# Altium PCB v007 pcb.PCBDOC
Units mm, origin at the board's own origin, x right, y up, seen from the top; angles counter-clockwise.
Board outline 15.54 x 5.89 mm, 2 copper layers (Top Layer, Bottom Layer); 13 components, 30 nets, 89 pads, 26 vias.
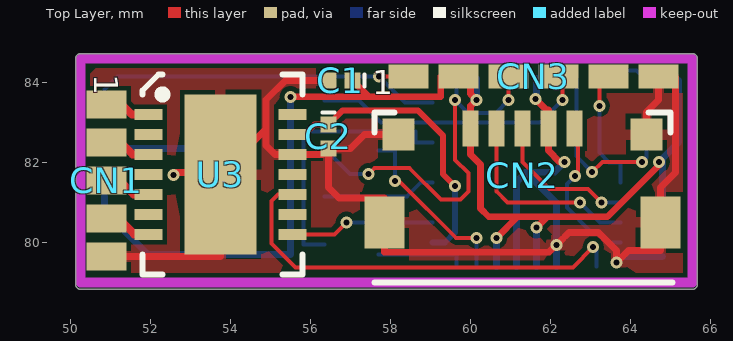
[diagram p0: Top Layer view]
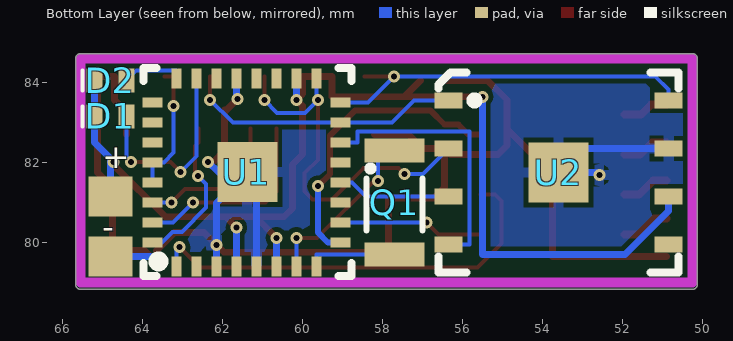
[diagram p1: Bottom Layer view, seen from below]

## Layer stack, top to bottom
Top Layer: signal copper 0.0356
Dielectric: core 0.32, FR-4, Dk 4.8
Bottom Layer: signal copper 0.0356

## Board outline
50.25,78.83 cw(c50.25,78.95) 50.13,78.95 50.13,84.6 cw(c50.25,84.6) 50.25,84.72 65.55,84.72 cw(c65.55,84.6) 65.67,84.6 65.67,78.95 cw(c65.55,78.95) 65.55,78.83

## Design rules (kind name [scope] priority, off if disabled: settings)
Clearance Clearance_Pad [All vs IsPad] p1: gap=0.12
Clearance Clearance_Via [(IsVia) vs (IsVia)] p2: gap=0.12
Clearance Polygon [InPoly vs IsPad] p3: gap=0.15
Clearance [All] p4: gap=0.12
FabricationTestPointUsage TestPointUsage [All] p1: valid=0 allowmultiple=FALSE
FabricationTestpoint Testpoint [All] p1: side=3 testpointundercomponent=TRUE minsize=1.016 maxsize=2.54 preferedsize=1.524 minholesize=0 maxholesize=1.016 preferedholesize=0.813 testpointgrid=0.025 allowsidetop=TRUE allowsidebottom=TRUE usegrid=TRUE gridtolerance=0
HoleSize [All] p1: absolutevalues=TRUE maxlimit=2.54 minlimit=0.04 maxpercent=80.000 minpercent=20.000
PolygonConnect [All] p1: connectstyle=Relief reliefconductorwidth=0.254 reliefentries=4 polygonreliefangle="90 Angle"
RoomDefinition "v007 schematics" [InComponentClass('v007 schematics')] p1: confinementstyle=ConfineIn formatcopy=TRUE lockcomponents=FALSE outline 0,0 50.8,0 50.8,25.4 0,25.4
RoutingCorners [All] p1: cornerstyle=Round minsetback=1 maxsetback=1
RoutingVias [All] p1: holewidth=0.15 width=0.3 viastyle="Through Hole" minholewidth=0.15 minwidth=0.3 maxholewidth=0.15 maxwidth=0.3
SMDNeckDown [All] p1: percent=100.000
SilkscreenOverComponentPads [All] p1: minsilkscreentomaskgap=0.254
SolderMaskExpansion SolderMaskExpansion_1 [(IsVia)] p1: expansion=-0.15
SolderMaskExpansion [All] p2: expansion=0.05
Width Width_3 [(InNet('PD5') OR InNet('PC5') OR InNet('NetD1_1'))] p1: maxlimit=0.15 minlimit=0.15 preferedwidth=0.15
Width Width_2 [(InNet('HEAD 1') OR InNet('HEAD 2') OR InNet('HEAD 3') OR InNet('HCOMMON'))] p2: maxlimit=0.2 minlimit=0.2 preferedwidth=0.2
Width Width_1 [(InNet('GND') OR InNet('VCC'))] p3: maxlimit=0.17 minlimit=0.17 preferedwidth=0.17
Width [All] p4: maxlimit=0.1 minlimit=0.1 preferedwidth=0.1
23 further rules are at their usual default settings.

## Components (designator, comment, footprint, x,y, rotation, side; value= is the part's Value field where it differs from the comment)
+ "No component mounted" SU01LS#1 64.7,81.15 r270 bottom
- "No component mounted" SU01LS#2 64.75,79.6 r90 bottom
C1 "100nF" CC0603(0201) 57.05,83.9 r180 top
C2 "100nF" CC0603(0201) 56.6,82.95 r270 top
CN1 "No component mounted" SU05LSR 50.9,83.45 r270 top
CN2 "Micro USB AB" "MICRO USB RECEPTACLE SMALL" 57.3,83.85 r0 top
CN3 "No component mounted" "SU06LST THICKER" 57.85,84.55 r0 top
D1 "LED1" CC1005(0402) 65.3,83.4 r180 bottom
D2 "LED1" CC1005(0402) 65.3,84.3 r180 bottom
Q1 "32.768khz crystal 1.5 x 3.2mm" "Quartz SMD 2" 56.8,82.7 r270 bottom
U1 "ATMEL ATMEGA168V-10MU-ND" "32M1-A L 3" 64,79.15 r90 bottom
U2 "ATMEL 4MBit DataFlash" "8M1-A MLF 3" 56.6,84.25 r180 bottom
U3 "Asic 3V MLF14" "delta asic - 5" 55.8,84.2 r270 top

## Footprints (in the part's own frame and the unit in brackets; to place one, negate y for a bottom-side part, rotate by r counter-clockwise, add the part's x,y. Pads: shape width x height; smd on the part's side, far side on the other; paste and mask are expansions set on the pad)
"8M1-A MLF 3" [mm] "for at45db161d"
  rect 0.7x0.4 smd: 1(0.25,-0.7) 2(0.25,-1.9) 3(0.25,-3.1) 4(0.25,-4.3) 5(5.75,-4.3) 6(5.75,-3.1) 7(5.75,-1.9) 8(5.75,-0.7)
  rect 1.5x1.5 smd: 9(3,-2.5)
  silkscreen extent 0,-5 6,0, body extent 0,-5 6,0, height 1
"32M1-A L 3" [mm] "atmel uc modified"
  rect 0.5x0.25 smd: 1(0.25,-0.85) 2(0.25,-1.35) 3(0.25,-1.85) 4(0.25,-2.35) 5(0.25,-2.85) 6(0.25,-3.35) 7(0.25,-3.85) 8(0.25,-4.35) 17(4.95,-4.35) 18(4.95,-3.85) 19(4.95,-3.35) 20(4.95,-2.85) 21(4.95,-2.35) 22(4.95,-1.85) 23(4.95,-1.35) 24(4.95,-0.85)
  rect 0.25x0.5 smd: 9(0.85,-4.95) 10(1.35,-4.95) 11(1.85,-4.95) 12(2.35,-4.95) 13(2.85,-4.95) 14(3.35,-4.95) 15(3.85,-4.95) 16(4.35,-4.95) 25(4.35,-0.25) 26(3.85,-0.25) 27(3.35,-0.25) 28(2.85,-0.25) 29(2.35,-0.25) 30(1.85,-0.25) 31(1.35,-0.25) 32(0.85,-0.25)
  rect 1.5x1.5 smd: 33(2.607,-2.624)
  silkscreen extent 0.01,-5.22 5.21,-0.02, body extent 0.1,-5.1 5.1,-0.1, height 1
CC0603(0201) [mm]
  rect 0.4x0.4 smd: 1(0,-0.15) 2(0.6,-0.15)
  silkscreen extent -0.3,-0.3 -0.3,0, body extent 0,-0.3 0.6,0, height 1
CC1005(0402) [mm]
  rect 0.4x0.6 smd: 1(0.1,-0.25) 2(0.9,-0.25)
  silkscreen extent -0.2,-0.5 -0.2,0, body extent 0,-0.5 1,0, height 1
"delta asic - 5" [mm]
  rect 0.28x0.7 smd: 1(1,-3.85) 2(1.5,-3.85) 3(2,-3.85) 4(2.5,-3.85) 5(3,-3.85) 6(3.5,-3.85) 7(4,-3.85) 8(4,-0.25) 9(3.5,-0.25) 10(3,-0.25) 11(2.5,-0.25) 12(2,-0.25) 13(1.5,-0.25) 14(1,-0.25)
  rect 4x1.8 smd: 15(2.5,-2.05)
  silkscreen extent 0,-4 5,0, body extent 0,-4 5,0, height 0.7
"MICRO USB RECEPTACLE SMALL" [mm] "Micro USB Receptacle (1981568-1-c - type b)"
  rect 0.4x0.9 smd: 1(2.7,-1) 2(3.35,-1) 3(4,-1) 4(4.65,-1) 5(5.3,-1)
  rect 1x1.3 smd: 6(0.55,-3.35) 6(7.45,-3.35)
  rect 0.8x0.8 smd: 6(0.9,-1.15) 6(7.1,-1.15)
  silkscreen extent 0.3,-4.85 7.75,-0.6, body extent 0.25,-5.55 7.75,-0.55, height 3
"Quartz SMD 2" [mm] "CC7V-T1A"
  rect 0.6x1.5 smd: 1(0.4,-0.9) 2(3,-0.9)
  silkscreen extent 0.8,-1.6 2.4,-0.2, body extent 0.1,-1.65 3.3,-0.15, height 0.5
SU01LS#1 [mm]
  rect 1x1.1 smd: 1(0,-0.1)
SU01LS#2 [mm]
  rect 1x1.1 smd: 1(0.05,0.05)
SU05LSR [mm]
  rect 0.7x1 smd: 1(0,0) 2(0.95,0) 3(1.9,0) 4(2.85,0) 5(3.8,0)
"SU06LST THICKER" [mm]
  rect 1x0.6 smd: 1(0.6,-0.4) 2(1.85,-0.4) 3(3.1,-0.4) 4(4.35,-0.4) 5(5.6,-0.4) 6(6.85,-0.4)

## Part data
+ -: library part "1pin smd"
C1 C2: library part Cap, "100nf Capacitor - Footprint CC0603 (0201)"
CN1: library part "5pin smd"
CN2: library part "micro usb", "Connector Receptacle Micro USB AB SMD Reverse Angle"
CN3: library part "6pin smd"
D1: library part LED3, "LED 0402 BLUE 465NM TRANSPARENT"
D2: library part LED3, "LED 0402 RED 465NM TRANSPARENT"
Q1: library part "2pin smd", "CRYSTAL 32.768KHZ 1.5 x 3.2mm"
U1: library part ATmega8L-8MC, "IC AVR MCU 16K 10MHZ 32-QFN 8-Bit AVR Microcontroller"
U2: library part at45db041b, "ATMEL 16MBit DataFlash"
U3: library part "delta asic 3volt"

## Via types
v1: diameter 0.3, hole 0.15, Top Layer to Bottom Layer, 26 vias

## Nets (pads, with @x,y where several pads share a name; then routed paths per layer and width w, separated by ;. In a path a pad name is that pad's centre, name@x,y a point inside that pad or via, vN(x,y) a via of type N, cw(c..) or ccw(c..) an arc to the next point about the centre after c; other vN are vias at no path point)
ADC6: U1.19
ADC7: U1.22
GND: -.1 C1.2 C2.2 CN1.5 CN2.4 CN2.6 CN3.6 U1.3 U1.5 U1.21 U1.33 U2.7 U2.9 U3.12 U3.15 | length 47.4
  Top Layer w0.17: CN1.5 53.75,79.65 U3.15 ; v1(52.578,81.686) 52.642,81.75 53.7,81.75 U3.15 ; C1.2 55.372,84.05 54.889,83.567 ; CN2.6@58.2,82.7 57.348,82.7 56.998,82.35 C2.2 ; v1(61.62,83.591) 61.9,83.312 61.95,83.312 CN2.4 61.95,82.296 62.229,82.017 v1(62.357,82.017) ; CN2.6@64.4,82.7 64.4,83.261 64.7,83.561 CN3.6 65.126,84.15 65.126,81.747 64.75,81.372 64.75,80.5 64.75,79.801 63.951,79.801 v1(63.652,79.502) 63.652,79.801 63.203,80.25 62.462,80.25 ; U3.15 54.889,82.839 ; 54.889,82.839 54.889,83.567 ; 54.889,82.839 54.889,83.567 ; 54.889,82.839 54.889,82.423 55.112,82.2 U3.12 56.3,82.2 C2.2 ; C2.2 56.45,81.37 56.711,81.109 57.85,81.109 57.85,80.5 57.85,79.756 61.968,79.756 v1(62.15,79.938) ; v1(62.15,79.938) 62.462,80.25 ; v1(62.15,79.938) 62.462,80.25
  Bottom Layer w0.17: U2.7 53,82.35 U2.9 52.642,81.75 v1(52.578,81.686) ; U1.5 61.15,81.5 U1.33 ; v1(61.62,83.591) 61.65,83.621 U1.21 ; U1.3 v1(62.15,79.938) 62.15,80.983 U1.33 ; v1(62.357,82.017) 62.097,81.757 U1.33 ; v1(63.652,79.502) 63.8,79.65 -.1
HCOMMON: CN1.1 U3.1 | length 1.2
  Top Layer w0.2: CN1.1 51.283,83.45 51.533,83.2 U3.1
"HEAD 1": CN1.2 U3.3 | length 1.2
  Top Layer w0.2: CN1.2 51.257,82.5 51.557,82.2 U3.3
"HEAD 2": CN1.3 U3.5 | length 1.2
  Top Layer w0.2: CN1.3 51.232,81.55 51.582,81.2 U3.5
"HEAD 3": CN1.4 U3.7 | length 1.2
  Top Layer w0.2: CN1.4 51.206,80.6 51.593,80.214 51.593,80.2 U3.7
PB0: U1.12 U2.3 | length 2.8
  Bottom Layer w0.1: U2.3 58.407,81.15 58.757,81.5 U1.12
PB1: U1.13
PB2: U1.14 U2.4 | length 6.8
  Bottom Layer w0.1: U2.4 55.829,79.95 55.829,82.779 58.623,82.779 58.623,82.5 U1.14
PB3: CN3.4 U1.15 U2.1 | length 7.1
  Top Layer w0.1: CN3.4 62.306,84.15 v1(62.306,83.566)
  Bottom Layer w0.1: U2.1 57.216,83.55 57.766,83 U1.15 61.74,83 v1(62.306,83.566)
PB4: CN3.1 U1.16 U2.8 | length 9.6
  Top Layer w0.1: v1(57.709,84.15) CN3.1
  Bottom Layer w0.1: U2.8 50.85,83.82 51.18,84.15 v1(57.709,84.15) 58.359,83.5 U1.16
PB5: CN3.3 U1.17 U2.2 | length 9.9
  Top Layer w0.1: v1(57.455,81.712) 57.598,81.855 58.48,81.855 59.259,81.076 59.753,81.076 59.95,81.274 59.95,81.731 59.614,82.067 v1(59.614,83.566) ; v1(60.95,83.556) CN3.3
  Bottom Layer w0.1: U2.2 56.988,81.712 v1(57.455,81.712) ; v1(59.614,83.566) v1@59.65,83.53 ; U1.17 59.65,83.566 v1@59.65,83.53 ; v1(60.95,83.556) 60.633,83.239 59.941,83.239 ; v1@59.65,83.53 59.941,83.239 ; v1@59.65,83.53 59.941,83.239
PC0: D1.2 U1.23 | length 5
  Top Layer w0.1: v1(63.043,81.763) 63.297,82.017 v1(64.287,82.017)
  Bottom Layer w0.1: U1.23 62.65,82.155 v1(63.043,81.763) ; v1(64.287,82.017) 64.4,82.129 D1.2
PC1: D2.2 U1.24 | length 1.5
  Bottom Layer w0.1: U1.24 63.15,84.295 64.155,84.295 D2.2
PC2: U1.25
PC3: U1.26
PC4: U1.27
PD2: CN2.5 U1.32 | length 3.8
  Top Layer w0.1: CN2.5 62.6,82.499 62.683,82.416 62.683,81.733 v1(62.611,81.661)
  Bottom Layer w0.1: v1(62.611,81.661) 62.408,81.458 62.408,80.874 63.017,80.264 63.246,80.264 63.51,80 U1.32
PD3: U1.1 U3.10 | length 10.7
  Top Layer w0.1: U3.10 55.19,81.2 55.029,81.038 55.029,79.972 55.625,79.375 62.56,79.375 v1(63.068,79.883)
  Bottom Layer w0.1: v1(63.068,79.883) 63.15,79.801 U1.1
PD4: U1.2
PD5: C2.1 U1.9 U3.13 | length 7.5
  Top Layer w0.15: U3.13 55.855,82.7 56.105,82.95 C2.1 56.795,83.295 58.691,83.295 59.309,82.677 59.309,81.712 v1(59.614,81.407)
  Bottom Layer w0.15: U1.9 59.363,80 59.614,80.251 v1(59.614,81.407)
PD6: U1.10 U3.8 | length 3.6
  Top Layer w0.1: U3.8 56.596,80.2 v1(56.896,80.5)
  Bottom Layer w0.1: v1(56.896,80.5) U1.10
PD7: U1.11
RST: CN3.5 U1.28 U1.29 | length 3.3
  Top Layer w0.1: v1(63.221,83.414) 63.221,84.15 CN3.5
  Bottom Layer w0.1: v1(63.221,83.414) 63.221,82.245 63.466,82 U1.28 U1.29
RX: CN2.3 U1.30 | length 3.7
  Top Layer w0.1: CN2.3 61.3,82.007 61.976,81.331 62.941,81.331 v1(63.271,81.001)
  Bottom Layer w0.1: v1(63.271,81.001) U1.30
TOSC1: Q1.1 U1.7 | length 4.5
  Top Layer w0.1: v1(58.115,81.534) 58.217,81.534 59.633,80.118 v1(60.15,80.118)
  Bottom Layer w0.1: Q1.1 58.115,82.3 v1(58.115,81.534) ; U1.7 v1(60.15,80.118)
TOSC2: Q1.2 U1.8 | length 2.2
  Bottom Layer w0.1: Q1.2 59.65,79.7 U1.8
TX: CN2.2 U1.31 | length 5
  Top Layer w0.1: CN2.2 60.65,81.28 60.929,81.001 v1(62.738,81.001)
  Bottom Layer w0.1: v1(62.738,81.001) 63.239,80.5 U1.31
VCC: +.1 C1.1 CN2.1 CN3.2 D1.1 D2.1 U1.4 U1.6 U1.18 U2.6 | length 36.3
  Top Layer w0.17: v1(55.499,83.642) 57.458,83.642 ; C1.1 57.458,83.642 ; v1(60.65,80.116) 61.177,80.642 ; v1(61.65,80.37) 61.923,80.642 ; v1(64.719,82.017) 64.719,81.94 63.421,80.642 ; 57.458,83.642 59.258,83.642 ; 57.458,83.642 59.258,83.642 ; 59.258,83.642 59.258,84.15 CN3.2 60,84.15 60,83.716 v1(60.15,83.566) 60,83.416 CN2.1 60,82.2 60.25,81.95 60.25,80.85 60.458,80.642 61.177,80.642 ; 61.177,80.642 61.923,80.642 ; 61.177,80.642 61.923,80.642 ; 61.923,80.642 63.421,80.642 ; 61.923,80.642 63.421,80.642 ; 61.923,80.642 63.421,80.642
  Bottom Layer w0.17: U2.6 50.85,80.79 51.94,79.7 55.499,79.7 v1(55.499,83.642) ; v1(60.15,83.566) U1.18 ; U1.6 v1(60.65,80.116) ; U1.4 v1(61.65,80.37) ; v1(64.719,82.017) v1@64.8,82.097 ; +.1 64.8,82.017 v1@64.8,82.097 ; D2.1 D1.1 65.2,82.497 ; v1@64.8,82.097 65.2,82.497 ; v1@64.8,82.097 65.2,82.497
pads on no net: U1.20 U2.5 U3.2 U3.4 U3.6 U3.9 U3.11 U3.14

## Polygon pours and split planes (outlines as drawn)
GND on Top Layer "Bottom Layer-No Net" (solid, remove dead copper, pour order 1000): 50.3,84.55 65.6,84.55 65.6,79.1 50.3,79.1
GND on Bottom Layer "Bottom Layer-No Net" (solid, remove dead copper, pour order 1001): 65.6,84.5 65.547,84.449 65.547,79.1 50.353,79.1 50.3,79.151 50.3,84.5

## Keep-outs
Keep-Out Layer:
  lines w0.24: 50.25,79 50.25,84.6 65.55,84.6 65.55,79 50.25,79

## Dimensions
50.25,79 to 65.55,79 on Mechanical 1
50.25,79 to 50.25,84.6 on Mechanical 1

## Text inside footprints (layer, text, board x,y; h text height)
CN1: Top Overlay "1" at 50.6,84.2 h0.6 r270
CN3: Top Overlay "1" at 57.55,83.7 h0.6